# Altium PCB USB_Wireless_Module.PcbDoc
Units mil, origin at the board's own origin, x right, y up, seen from the top; angles counter-clockwise.
Board outline 1180 x 615 mil, 4 copper layers (Top Layer, Voltage Plane, GND Plane, Bottom Layer); 39 components, 25 nets, 179 pads, 31 vias.
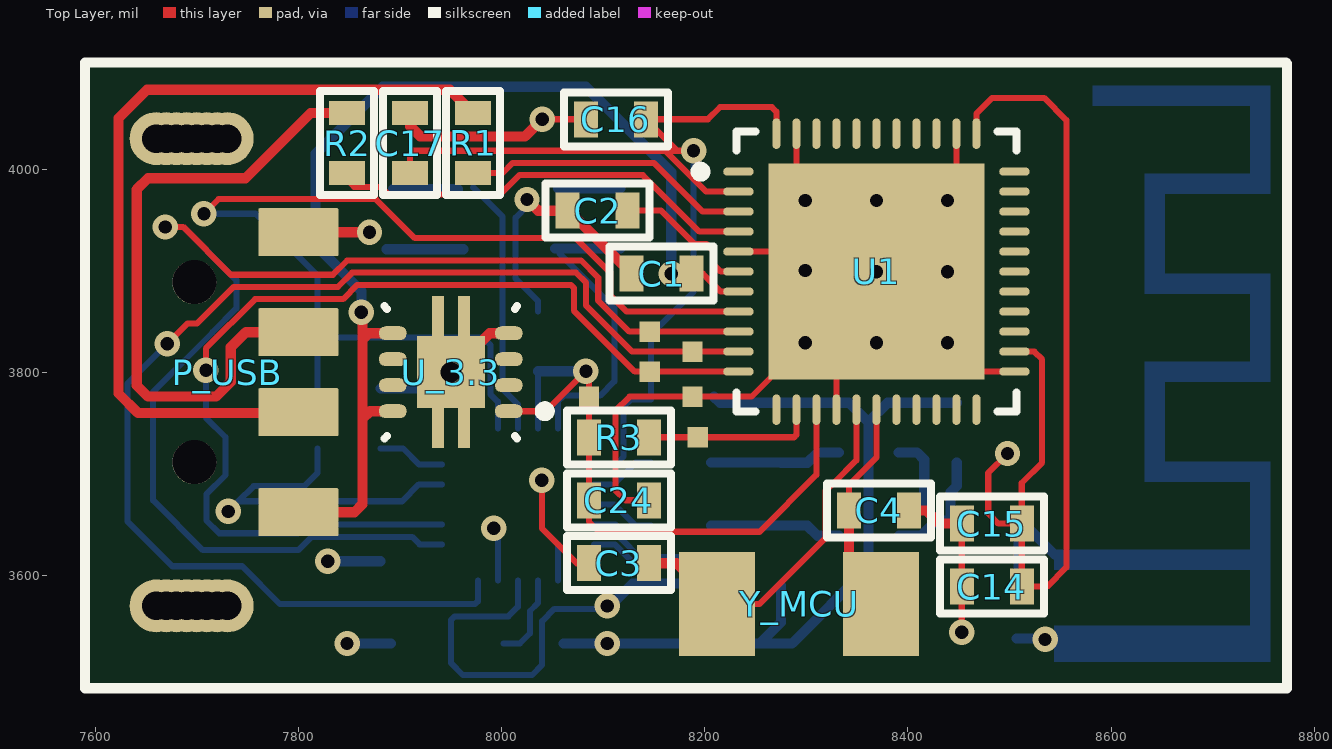
[diagram p0: Top Layer view]
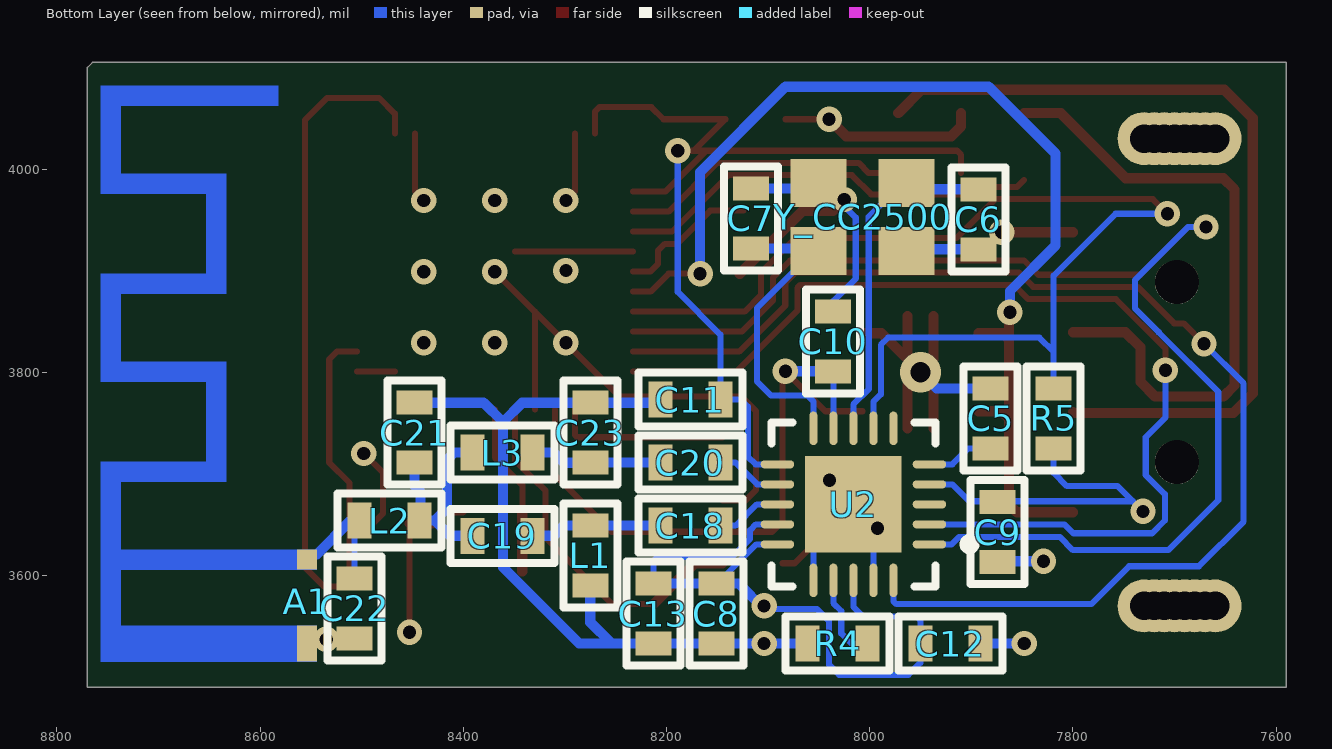
[diagram p1: Bottom Layer view, seen from below]
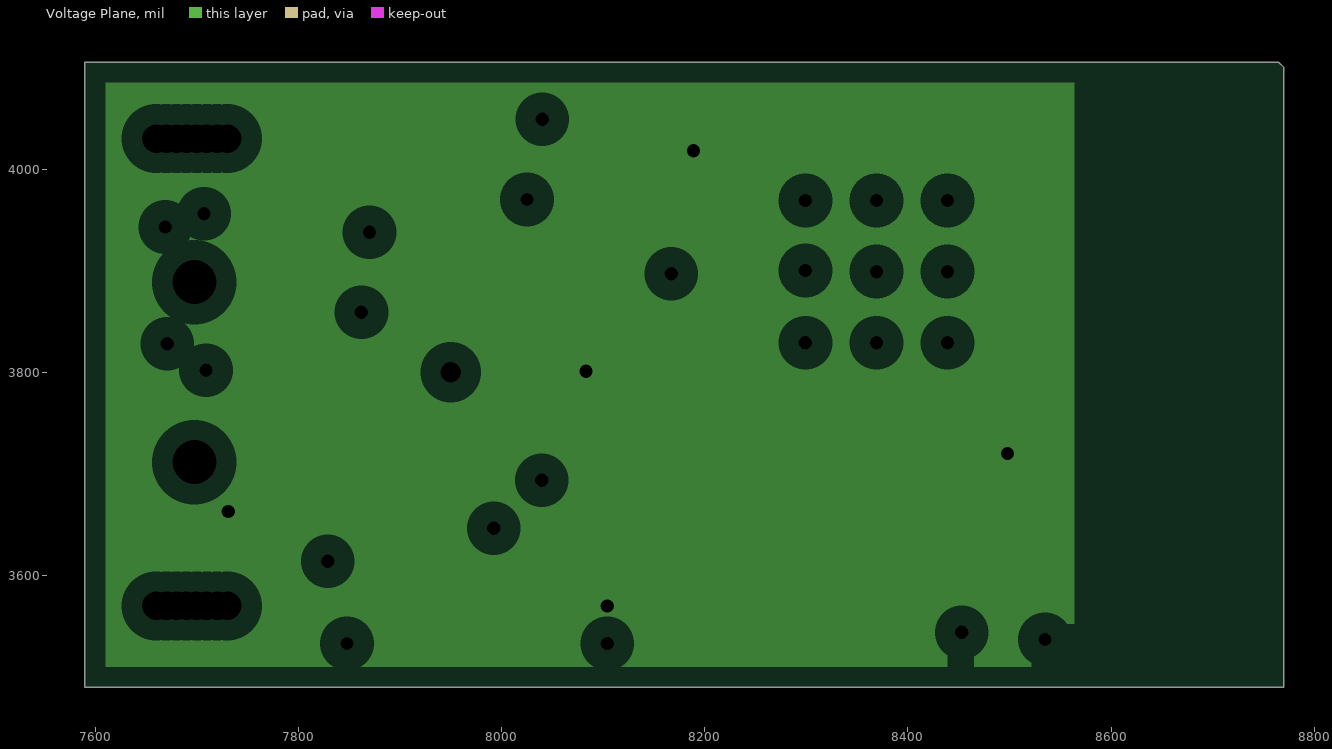
[diagram p2: Voltage Plane, clearances drawn from the general rule]
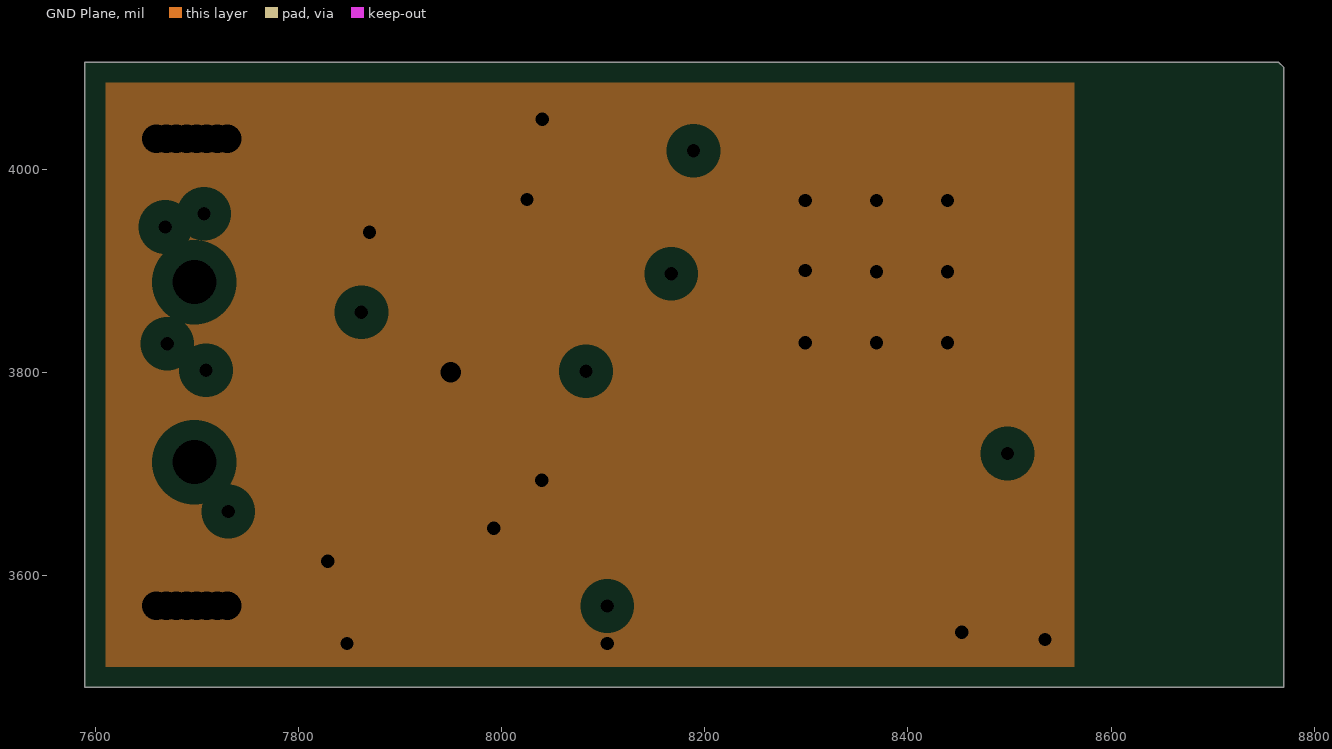
[diagram p3: GND Plane, clearances drawn from the general rule]

## Layer stack, top to bottom
Top Layer: signal copper 1.4
Dielectric: core 12.6, FR-4, Dk 4.8
Voltage Plane: plane copper 1.4, net V_3.3
Dielectric: prepreg 12.6, FR-4, Dk 4.8
GND Plane: plane copper 1.4, net GND
Dielectric: core 12.6, FR-4, Dk 4.8
Bottom Layer: signal copper 1.4

## Board outline
8770,3490 8770,4100 8765,4105 7590,4105 7590,3490

## Design rules (kind name [scope] priority, off if disabled: settings)
Clearance [All] p1: gap=6
ComponentClearance [All] p1: gap=0 collisioncheckmode=3 verticalgap=10 showdistances=FALSE
HoleSize [All] p1: absolutevalues=TRUE maxlimit=100 minlimit=13 maxpercent=80.000 minpercent=20.000
MinimumSolderMaskSliver [All] p1: minsoldermaskwidth=6
PlaneClearance [All] p1: clearance=20
PlaneConnect USB_Plane_Connect [(InNet('GND') AND InComponent('P_USB'))] p1: planeconnectstyle=Relief reliefexpansion=10 reliefentries=4 reliefconductorwidth=30 reliefairgap=10
PlaneConnect [All] p2: planeconnectstyle=Relief reliefexpansion=20 reliefentries=4 reliefconductorwidth=10 reliefairgap=10
PolygonConnect [All] p1: connectstyle=Relief reliefconductorwidth=10 reliefentries=4 polygonreliefangle="90 Angle"
RoutingVias [All] p1: holewidth=13 width=25 viastyle="Through Hole" minholewidth=13 minwidth=25 maxholewidth=50 maxwidth=100
SilkToSilkClearance [All] p1: silktosilkclearance=0
SilkscreenOverComponentPads [All] p1: minsilkscreentomaskgap=1
SolderMaskExpansion [All] p1: expansion=2
Width [All] p1: maxlimit=100 minlimit=6 preferedwidth=6
21 further rules are at their usual default settings.

## Components (designator, comment, footprint, x,y, rotation, side; value= is the part's Value field where it differs from the comment)
A1 "IFA" Meandered_Inverted_F_Antenna 8554,3533 r90 bottom
C1 "10uF" 0603 8158,3897 r0 top
C2 "1uF 0603" 0603 8095,3959 r0 top
C3 "30pF" 0603 8116,3612 r0 top
C4 "30pF" 0603 8371,3664 r180 top
C5 "100nF" 0603 7881,3755 r90 bottom
C6 "30pF" 0603 7893,3951 r90 bottom
C7 "30pF" 0603 8117,3951 r270 bottom
C8 "100nF" 0603 8151,3563 r90 bottom
C9 "100nF" 0603 7874,3643 r90 bottom
C10 "100nF" 0603 8036,3830 r270 bottom
C11 "220pF" 0603 8176,3773 r180 bottom
C12 "220pF" 0603 7921,3533 r0 bottom
C13 "220pF" 0603 8213,3563 r90 bottom
C14 "100nF" 0603 8482,3589 r180 top
C15 "100nF" 0603 8482,3651 r180 top
C16 "100nF" 0603 8112,4049 r180 top
C17 "100nF" 0603 7910,4026 r90 top
C18 "100pF 0603" 0603 8177,3649 r0 bottom
C19 "1.0 pF 0603" 0603 8362,3639 r0 bottom
C20 "100pF 0603" 0603 8177,3711 r0 bottom
C21 "1.8pF 0603" 0603 8448,3740 r270 bottom
C22 "1.5pF 0603" 0603 8507,3568 r90 bottom
C23 "1.0 pF 0603" 0603 8275,3740 r270 bottom
C24 "100nF" 0603 8116,3674 r0 top
L1 "1.2nH 0603" 0603 8275,3619 r270 bottom
L2 "1.2nH 0603" 0603 8473,3654 r0 bottom
L3 "1.2nH 0603" 0603 8361,3721 r180 bottom
P_USB "USB-A" 480372200 7800,3800 r270 top
R1 "22R" 0603 7972,4025 r270 top
R2 "22R" 0603 7848,4025 r270 top
R3 "4k7" 0603 8116,3736 r0 top
R4 "56k" 0603 8032,3533 r0 bottom
R5 "10k" 0603 7819,3754 r270 bottom
U1 "IC - ATMEGA32U4" QFN50P700X700X90-44N 8369,3899 r0 top
U2 "IC - CC2500" "TI - RTK / QFN50P400X400X90-20N" 8016,3670 r0 bottom
U_3.3 "IC - TPS73633" "TI - DRB / QFN65P300X300X100-8L" 7950,3800 r180 top
Y_CC2500 "36MHz 18pF" 7M-36.000MAAJ-T 8007,3953 r0 bottom
Y_MCU "8MHz 18pF" ABM7-8.000MHZ-D-2-Y-T 8293,3572 r0 top

## Footprints (in the part's own frame and the unit in brackets; to place one, negate y for a bottom-side part, rotate by r counter-clockwise, add the part's x,y. Pads: shape width x height; smd on the part's side, far side on the other; paste and mask are expansions set on the pad)
7M-36.000MAAJ-T [mm] "CRYSTAL 36.000 MHZ 18PF SMD"
  rect 1.4x1.2 smd: 1(-1.1,-0.85) 2(1.1,0.85) 3(-1.1,0.85) 3(1.1,-0.85)
0603 [mm] "Non polarized 0603 footprint"
  rect 0.6x0.9 smd: 1(-0.762,0) 2(0.738,0)
  silkscreen extent -1.31,-0.67 1.29,0.67
480372200 [mil] "CONN PLUG USB A 4POS SMD R/A"
  round 43.31 hole 43.31: 0(-88.58,-102.36) 0(88.58,-102.36)
  rrect5% 47.24x78.74 smd: 1(137.8,0) 2(39.37,0) 3(-39.37,0) 4(-137.8,0)
  round 52 hole 28: 5(-230,-70) 5(-230,-140) 5(-230,-130) 5(-230,-120) 5(-230,-110) 5(-230,-100) 5(-230,-90) 5(-230,-80) 5(230,-70) 5(230,-140) 5(230,-130) 5(230,-120) 5(230,-110) 5(230,-100) 5(230,-90) 5(230,-80)
  silkscreen extent -260,-211 260,-211, body extent -236,-799 236,0, height 150
ABM7-8.000MHZ-D-2-Y-T [mm] "CRYSTAL 8.0000 MHZ 18PF SMD"
  rect 1.9x2.6 smd: 1(-2.05,0) 2(2.05,0)
Meandered_Inverted_F_Antenna [mm]
  rect 0.5x0.5 smd mask+0: 1(2.1,0)
  rect 0.9x0.5 smd mask+0: 2(0,0)
  Top Layer region: 13.95,5.15 13.45,5.15 13.45,0.71 13.95,0.71
  Top Layer region: 9.25,5.15 8.75,5.15 8.75,2.01 9.25,2.01
  Top Layer region: 8.75,2.01 8.75,2.51 11.75,2.51 11.75,2.01
  Top Layer region: 11.75,5.15 11.25,5.15 11.25,2.01 11.75,2.01
  Top Layer region: 11.25,4.65 11.25,5.15 13.95,5.15 13.95,4.65
  Top Layer region: 6.55,4.65 6.55,5.15 9.25,5.15 9.25,4.65
  Top Layer region: 7.05,5.15 6.55,5.15 6.55,2.01 7.05,2.01
  Top Layer region: 4.05,2.01 4.05,2.51 7.05,2.51 7.05,2.01
  Top Layer region: 4.55,5.15 4.05,5.15 4.05,2.01 4.55,2.01
  Top Layer region: 1.85,-0.25 1.85,5.15 2.35,5.15 2.35,-0.25
  Top Layer region: -0.45,4.65 -0.45,5.15 4.55,5.15 4.55,4.65
  Top Layer region: -0.45,-0.25 -0.45,5.15 0.45,5.15 0.45,-0.25
QFN50P700X700X90-44N [mil] "QFN, 44-Leads, Body 7.0x7.0mm (max), Pitch 0.50mm, IPC Medium Density"
  oval 30x8 smd: 1(-135.83,98.43) 2(-135.83,78.74) 3(-135.83,59.06) 4(-135.83,39.37) 5(-135.83,19.69) 6(-135.83,0) 7(-135.83,-19.68) 8(-135.83,-39.37) 9(-135.83,-59.06) 10(-135.83,-78.74) 11(-135.83,-98.43) 23(135.83,-98.43) 24(135.83,-78.74) 25(135.83,-59.06) 26(135.83,-39.37) 27(135.83,-19.68) 28(135.83,0) 29(135.83,19.69) 30(135.83,39.37) 31(135.83,59.06) 32(135.83,78.74) 33(135.83,98.43)
  oval 8x30 smd: 12(-98.43,-135.83) 13(-78.74,-135.83) 14(-59.06,-135.83) 15(-39.37,-135.83) 16(-19.69,-135.83) 17(0,-135.83) 18(19.68,-135.83) 19(39.37,-135.83) 20(59.06,-135.83) 21(78.74,-135.83) 22(98.43,-135.83) 34(98.43,135.83) 35(78.74,135.83) 36(59.06,135.83) 37(39.37,135.83) 38(19.68,135.83) 39(0,135.83) 40(-19.69,135.83) 41(-39.37,135.83) 42(-59.06,135.83) 43(-78.74,135.83) 44(-98.43,135.83)
  rect 212.6x212.6 smd: 45(0,0)
  silkscreen extent -178,-138 138,138, body extent -138,-138 138,138, height 35
"TI - DRB / QFN65P300X300X100-8L" [mm] "QFN, 8-Leads, Body 3.2x3.2mm (max), Pitch 0.65mm, IPC High Density"
  oval 0.7x0.35 smd: 1(-1.45,0.975) 2(-1.45,0.325) 3(-1.45,-0.325) 4(-1.45,-0.975) 5(1.45,-0.975) 6(1.45,-0.325) 7(1.45,0.325) 8(1.45,0.975)
  rect 0.3x1 smd: 9(-0.325,1.4) 9(-0.325,-1.4) 9(0.325,1.4) 9(0.325,-1.4)
  rect 1.7x1.8 smd: 9(0,0)
  silkscreen extent -2.48,-1.65 1.65,1.65, body extent -1.58,-1.58 1.58,1.58, height 1
"TI - RTK / QFN50P400X400X90-20N" [mil] "QFN, 20-Leads, Body 4.1x4.1mm (max), Pitch 0.50mm, IPC Medium Density"
  oval 33x8 smd: 1(-74.8,39.37) 2(-74.8,19.68) 3(-74.8,0) 4(-74.8,-19.69) 5(-74.8,-39.37) 11(74.8,-39.37) 12(74.8,-19.69) 13(74.8,0) 14(74.8,19.68) 15(74.8,39.37)
  oval 8x33 smd: 6(-39.37,-74.8) 7(-19.69,-74.8) 8(0,-74.8) 9(19.69,-74.8) 10(39.37,-74.8) 16(39.37,74.8) 17(19.69,74.8) 18(0,74.8) 19(-19.69,74.8) 20(-39.37,74.8)
  rect 95x95 smd: 21(0,0)
  silkscreen extent -119,-81 81,81, body extent -81,-81 81,81, height 35

## Part data
A1: library part Meandered_Inverted_F_Antenna
C1: library part "CP - 10uF 0603", "CAP CER 10000PF 50V X7R 0603"
C2: library part "CP - 1uF 0603", "CAP CER 1.0UF 50V X5S 0603"
C3 C4 C6 C7: library part "CP - 30pF 0603", "CAP CER 30PF 50V C0G 0603"
C5 C8 C9 C10 C14 C15 C16 C17 C24: library part "CP - 100nF 0603", "CAP CER .10UF 50V X5R 0603"
C11 C12 C13: library part "CP - 220pF 0603", "CAP CER 220PF 50V NP0 0603"
C18 C20: library part "CP - 100pF 0603", "CAP CERM 100PF 5% 50V NP0 0603"
C19 C23: library part "CP - 1.0pF 0603", "CAP CER 1.0PF 50V C0G 0603"
C21: library part "CP - 1.8pF 0603", "CAP CER 1.8PF 50V C0G 0603"
C22: library part "CP - 1.5pF 0603", "CAP CER 1.5PF 50V C0G 0603"
L1 L2 L3: library part "L - 1.2nH 0603", "INDUCTOR HI FREQ 1.2+/-0.3NH"
P_USB: library part "H - USB A Plug SMD", "CONN PLUG USB A 4POS SMD R/A"
R1 R2: library part "RS - 22R 0603", "RES 22 OHM 1/10W 5% 0603 SMD"
R3: library part "RS - 4k7 0603", "RES 4.70K OHM 1/10W 1% 0603 SMD"
R4: library part "RS - 56k 0603", "RES 56K OHM 1/10W 5% 0603 SMD"
R5: library part "RS - 10k 0603", "RES 10.0K OHM 1/10W 1% 0603 SMD"
U1: "MCU AVR 32K FLASH 16MHZ 44-QFN"
U2: "IC RF TXRX SNGL-CHIP LP 20-QFN"
U_3.3: "IC LDO REG 400MA NO CAP 8-SON"
Y_CC2500: library part "X - 36MHz 18pF", "CRYSTAL 36.000 MHZ 18PF SMD"
Y_MCU: library part "X - 8MHz 18pF", "CRYSTAL 8.0000 MHZ 18PF SMD"

## Free pads (board coordinates)
  rect 20x20 smd: 2(8086,3776) 2(8146,3839.94) 2(8188,3776) 2(8193,3736) 3(8188,3820.26) 4(8146,3800.57)

## Via types
v1: diameter 25, hole 13, Top Layer to Bottom Layer, 19 vias
v2: diameter 25, hole 13, Top Layer to Bottom Layer, tented top, 11 vias
v3: diameter 40, hole 20, Top Layer to Bottom Layer, tented top, 1 vias

## Nets (pads, with @x,y where several pads share a name; then routed paths per layer and width w, separated by ;. In a path a pad name is that pad's centre, name@x,y a point inside that pad or via, vN(x,y) a via of type N, cw(c..) or ccw(c..) an arc to the next point about the centre after c; other vN are vias at no path point)
CS: R5.1 U1.8 U2.7 | length 1129.4
  Top Layer w6: v1(7707,3956) 7721.42,3970.42 7876.36,3970.42 7914.77,3932 8073.2,3932 8107.19,3898.01 8107.19,3875.56 8123.11,3859.63 U1.8
  Bottom Layer w6: v1@7717,3956 7758,3956 7819,3895 R5.1 7819,3820 7833,3834 7982,3834 7989,3827 7989,3778.34 7996.31,3771.03 U2.7
GND: A1.1 A1.2 C1.1 C2.1 C3.1 C4.1 C5.2 C6.1 C7.1 C8.1 C9.1 C10.1 C11.1 C12.1 C13.1 C14.2 C15.2 C16.2 C17.2 C21.1 C22.1 C22.2 C23.1 C24.2 L1.2 L2.2 P_USB.4 P_USB.5 pad.2@8188,3776 R4.2 U1.5 U1.15 U1.23 U1.35 U1.43 U1.45 U2.16 U2.19 U2.21 U_3.3.4 U_3.3.9 Y_CC2500.3 | length 3173.6
  Top Layer w6: v2(8039.62,3693.62) 8039.62,3646.38 8074,3612 C3.1 ; v1(8040,4049) C16.2 ; C24.2 8122,3674 8112,3684 8112,3762 8126,3776 8246,3776 v2(8369,3899) ; U1.5 U1.45@8349.31,3918.69 ; U1.45@8290.26,3977.74 U1.43 ; U1.15 U1.45@8329.63,3859.63 ; U1.45@8447.74,3977.74 U1.35 ; v1@8452.94,3542 C14.2 C15.2 ; U1.45@8467.43,3800.57 U1.23
  Top Layer w10: P_USB.4 v1(7870,3937.8) ; C17.2 7910,4042 7919.81,4032.19 8023.19,4032.19 v1(8040,4049) ; U_3.3.9@7937.2,3744.88 U_3.3.9@7937.2,3787.2 ; U_3.3.9@7937.2,3812.8 U_3.3.9@7937.2,3855.12 ; v3(7950,3800) 7988.39,3838.39 U_3.3.4 ; U_3.3.9@7962.8,3744.88 U_3.3.9@7962.8,3787.2 ; U_3.3.9@7962.8,3819.2 U_3.3.9@7962.8,3855.12 ; v1(8025,3970) 8036,3959 C2.1 ; C2.1@8066,3959 C1.1 ; C4.1 8418,3664 8431,3651 C15.2
  Bottom Layer w6: U2.19 U2.21@7996.31,3650.32 ; Y_CC2500.3@8025,3963.41 8013.75,3952.16 8013.75,3892.19 8036,3869.93 C10.1 ; U2.16 U2.21@8055.37,3630.63 ; C22.2@8507.06,3597.11 L2.2@8507.06,3654
  Bottom Layer w10: v1(7829,3614) C9.1@7881,3614 ; v1(7848,3533) C12.1 ; C5.2 7934.06,3784.06 v3(7950,3800) ; C6.1@7886.8,3921 C6.1 Y_CC2500.3@7962.23,3921 ; Y_CC2500.3@8055.77,3981 C7.1 ; R4.2 v1(8104,3533) C8.1 C13.1 8254,3533 ; C11.1@8209,3776 8215,3770 C23.1 8342,3770 8361,3751 ; L1.2 8275,3554 8254,3533 ; C21.1 8380,3770 8361,3751 ; C22.1 A1.2@8549,3538 ; L2.2@8507.38,3653.68 8511.16,3653.68 8544.16,3620.68 A1.1@8554,3620.68 ; 8254,3533 8286,3533 8361,3608 8361,3751
  other v1: 8535,3537 8453,3544
  other v2: 7992.38,3646.38 8299,3829 8369,3829 8439,3829 8439,3899 8299,3900 8299,3969 8369,3969 8439,3969
MISO: pad.4 U1.11 U2.2 | length 1024.3
  Top Layer w6: v1(7709,3802) 7709,3823.4 7757.59,3871.99 7843.99,3871.99 7858,3886 8068.29,3886 8071.19,3883.1 8071.19,3860.64 8131.26,3800.57 U1.11
  Bottom Layer w6: v1(7709,3802) 7709,3755.32 7728.29,3736.02 7728.29,3698.72 7709.5,3679.93 7709.5,3654.09 7722.09,3641.5 7799.53,3641.5 7808.34,3650.32 U2.2
MOSI: pad.3 U1.10 U2.20 | length 1227.8
  Top Layer w6: v1(7671,3828) 7691,3848 7700.41,3848 7736.4,3883.99 7839.02,3883.99 7853.03,3898 8073.26,3898 8083.19,3888.07 8083.19,3865.61 8128.54,3820.26 U1.10
  Bottom Layer w6: v1(7671,3828) 7632,3789 7632,3653 7676,3609 7744.64,3609 7781.93,3571.72 7973.72,3571.72 7976.63,3574.63 U2.20
NetA1_1: 
NetC2_2: C2.2 U1.6 | length 141.7
  Top Layer w6: C2.2 8157.03,3959 8189.66,3926.37 8201.63,3926.37 8208.43,3919.57 8208.43,3906.44 8215.87,3899 U1.6
NetC3_2: C3.2 U1.16 Y_MCU.1 | length 356.3
  Top Layer w6: Y_MCU.1 8254,3572 8319,3637 8319,3683.31 8326.41,3690.72 8326.72,3690.72 8349.31,3713.31 U1.16
  Top Layer w10: C3.2 8172.29,3612 Y_MCU.1
NetC4_2: C4.2 U1.17 Y_MCU.2 | length 170.6
  Top Layer w6: C4.2 8341.94,3688.97 8369,3716.03 U1.17
  Top Layer w10: Y_MCU.2@8341.94,3603.76 C4.2
NetC5_1: C5.1 U2.5 | length 66.7
  Bottom Layer w6: C5.1 7903,3725 7918.63,3709.37 U2.5
NetC6_2: C6.2 U2.8 Y_CC2500.1 | length 319.7
  Bottom Layer w6: Y_CC2500.1@7972,3982 8001,3953 8001,3783.32 8016,3768.32 U2.8
  Bottom Layer w10: C6.2 Y_CC2500.1@7957.28,3980.06
NetC7_2: C7.2 U2.10 Y_CC2500.2 | length 303
  Bottom Layer w6: U2.10 8055.37,3771.37 8061,3777 8097,3777 8111,3791 8111,3863 Y_CC2500.2@8057,3917
  Bottom Layer w10: Y_CC2500.2@8052.72,3921.94 C7.2
NetC18_1: C18.1 U2.13 | length 64.9
  Bottom Layer w6: U2.13 8111,3670 8132,3649 C18.1
NetC18_2: C18.2 C19.1 L1.1 | length 130.1
  Bottom Layer w10: C18.2 L1.1 8301,3649 8311,3639 C19.1
NetC19_2: C19.2 C21.2 L2.1 L3.1 | length 222.9
  Bottom Layer w10: C19.2 8413,3639 8428,3654 ; L3.1@8392,3721 L3.1 ; L3.1@8402,3721 L3.1 ; C21.2 8448,3688 8442,3682 8442,3655 L2.1 8428,3654 ; L3.1 8409,3721 8416,3714 8416,3666 8428,3654
NetC20_1: C20.1 U2.12 | length 65
  Bottom Layer w6: U2.12 8110.69,3689.69 8132,3711 C20.1
NetC20_2: C20.2 C23.2 L3.2 | length 130.1
  Bottom Layer w10: C20.2 C23.2@8275,3711 ; C23.2 8300.94,3710.94 8311,3721 L3.2
NetP_USB_2: P_USB.2 R1.1 | length 826.3
  Top Layer w10: P_USB.2 7799.37,3760 7642,3760 7623,3779 7623,4050 7651,4078 7949,4078 R1.1
NetP_USB_3: P_USB.3 R2.1 | length 640.8
  Top Layer w10: P_USB.3 7748.37,3839.37 7733.53,3824.53 7733.53,3790.53 7719,3776 7652,3776 7641,3787 7641,3980 7652,3991 7748,3991 7812,4055 R2.1
NetR1_2: R1.2 U1.3 | length 285.2
  Top Layer w6: R1.2 8000.94,3995.94 8011,4006 8150,4006 8197.94,3958.06 U1.3
NetR2_2: R2.2 U1.4 | length 422.6
  Top Layer w6: R2.2@7848,3989.27 7854.85,3982.42 7882.55,3982.42 7882.55,3981.19 7888.56,3975.19 7889.78,3975.19 7889.84,3975.13 7998.72,3975.13 8017.58,3994 8139,3994 8194.63,3938.37 U1.4
NetR4_1: R4.1 U2.17 | length 85.5
  Bottom Layer w6: R4.1 8018,3533 8028,3543 8028,3565 8035.69,3572.69 U2.17
R\E\S\E\T\: pad.2@8193,3736 R3.2 U1.13 | length 171.1
  Top Layer w6: R3.2 8288,3736 8290.26,3738.26 U1.13
SCLK: pad.2@8146,3839.94 U1.9 U2.1 | length 1284.6
  Top Layer w6: v1(7669,3943) 7686.57,3943 7733.58,3895.99 7834.05,3895.99 7848.06,3910 8078.23,3910 8095.19,3893.04 8095.19,3870.59 8125.83,3839.94 U1.9
  Bottom Layer w6: v1@7671.24,3943 7686.57,3943 7739,3890.57 7739,3863 7715.5,3839.5 7715.5,3839.09 7657,3780.59 7657,3674 7706,3625 7800,3625 7813,3638 7912,3638 7919.37,3630.63 U2.1
V_3.3: C8.2 C9.2 C10.2 C11.2 C12.2 C13.2 C14.1 C15.1 C16.1 C17.1 C24.1 pad.2@8086,3776 R3.1 R5.2 U1.2 U1.14 U1.24 U1.34 U1.44 U2.4 U2.9 U2.11 U2.14 U2.15 U2.18 U_3.3.1 | length 3642.7
  Top Layer w6: C17.1 7910,4014 7914,4018 8161,4018 ; U_3.3.1 8043.67,3761.61 v1(8083,3800.94) ; v1@8086,3797.94 R3.1 C24.1 8086,3653 8096,3643 8254,3643 8309.94,3698.94 U1.14 ; v1(8189,4018) 8173,4018 ; U1.2 8201.26,3977.74 8161,4018 ; U1.44 8270.57,4056.43 8266,4061 8215,4061 8203,4049 C16.1 8173,4018 ; U1.34 8467.43,4054.43 8483,4070 8534,4070 8556,4048 8556,3608 8537,3589 C14.1 C15.1 ; v1(8498,3720) 8479,3701 8479,3661 8489,3651 C15.1 ; U1.24 8524.43,3820.26 8532,3812.69 8532,3711 8512,3691 C15.1 ; 8161,4018 8173,4018
  Bottom Layer w6: v1(7731,3663) 7741.06,3673.06 ; R5.2 7819,3701 7806,3688 7756,3688 7741.06,3673.06 ; U2.4 7918.69,3689.69 7902.06,3673.06 7881,3673.06 7741.06,3673.06 ; U2.18 8016,3569 8006.72,3559.72 7953.72,3559.72 7950.06,3556.06 C12.2 7950.06,3513.94 7962,3502 8030,3502 8040,3512 8040,3555 8052,3567 v1@8104,3567 ; U2.9 C10.2@8035.69,3799.63 ; U2.15 8111.63,3630.63 C8.2@8150.2,3592.06 ; U2.14 8112,3650.32 8117.66,3644.66 8117.66,3636.09 8135.74,3618 8209,3618 8213,3614 C13.2 ; U2.11 8112.37,3709.37 8120,3717 8120,3766 8127,3773 C11.2 8146.94,3836.94 8189,3879 v1(8189,4018)
  Bottom Layer w10: C10.2 v1(8083,3800.94) ; v1@8104,3567 8129.06,3592.06 8150.2,3592.06 C8.2 C13.2
  other v1: 8104,3570
V_5: C1.2 P_USB.1 U1.7 U_3.3.5 U_3.3.8 | length 1079.5
  Top Layer w6: v1(8167,3897) 8198,3897 8215.68,3879.32 U1.7
  Top Layer w10: P_USB.1 7855.2,3662.2 7863,3670 7863,3754 7870.61,3761.61 U_3.3.8 ; v1(7862,3859) 7863,3858 7863,3832 ; 7863,3756 7863,3832 ; U_3.3.5 7869.39,3838.39 7863,3832
  Bottom Layer w10: v1(7862,3859) 7862,3880 7817,3925 7817,4015 7883,4081 8083,4081 8167,3997 v1(8167,3897)
pads on no net: P_USB.0 U1.1 U1.12 U1.18 U1.19 U1.20 U1.21 U1.22 U1.25 U1.26 U1.27 U1.28 U1.29 U1.30 U1.31 U1.32 U1.33 U1.36 U1.37 U1.38 U1.39 U1.40 U1.41 U1.42 U2.3 U2.6 U_3.3.2 U_3.3.3 U_3.3.6 U_3.3.7

## Polygon pours and split planes (outlines as drawn)
V_3.3 on Voltage Plane (split plane): 8564,3552 8522,3552 8522,3510.1 8465,3510.1 8465,3529 8439,3529 8439,3510.1 7610.1,3510.1 7610.1,4084.9 8564,4084.9
GND on GND Plane (split plane): 8564,3510.1 7610.1,3510.1 7610.1,4084.9 8564,4084.9

## Other copper
Voltage Plane (plane layer: these items are gaps in the copper):
  rectangle: 8564,3490 8770,4100
  rectangle: 8522,3505 8578,3552
  rectangle: 8439,3504 8465,3529
GND Plane (plane layer: these items are gaps in the copper):
  rectangle: 8564,3490 8770,4100

## Silkscreen, mask and mechanical layers (free items; w line width, h text height)
Top Overlay:
  lines w10: 7590,3489 7590,4105 8772,4105 8773,4104 8773,3489 7590,3489

## Text inside footprints (layer, text, board x,y; h text height)
A1: Mechanical 15 "GND Plane Edge" at 8570.14,3551.5 h3.94 r270